# EAGLE board tashtari (EAGLE 6.5.0)
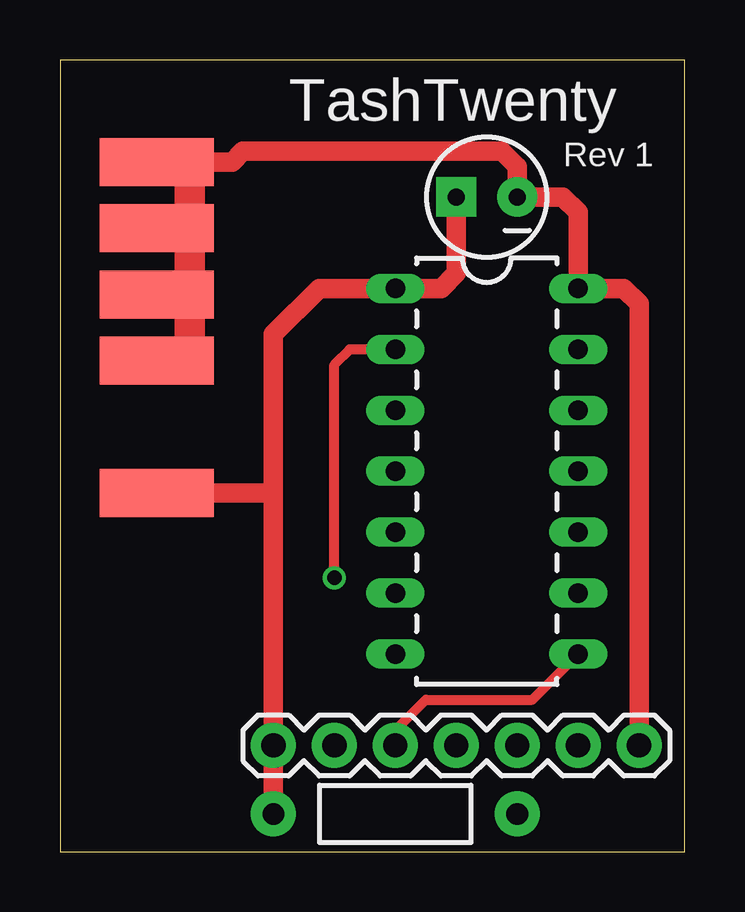
[diagram p0: board, top side]
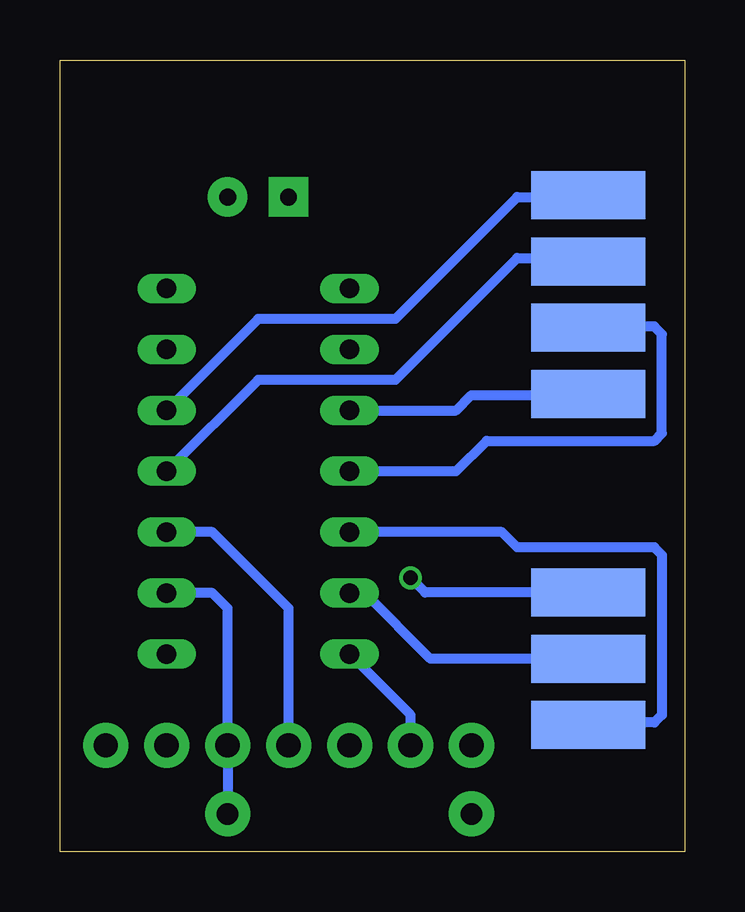
[diagram p1: board, bottom side, seen from below]

Size 26.04 x 33.02 mm. Coordinates in mm from the lower left corner, seen from the top.
Outline: 0,0 26.04,0 26.04,33.02 0,33.02 0,0
Copper layers (1*16): Top 0.0356mm / dielectric 1.5011mm / Bottom 0.0356mm
Design rules "LaenPCBOrder": minimum track width 6mil, minimum drill 13mil, track to track 6mil, track to pad 6mil, pad to pad 6mil, via to via 6mil, smd to smd 6mil, copper to edge 15mil, drill to drill 6mil, minimum pad ring 7mil, minimum via ring 7mil, stop-mask expansion 3mil, vias tented up to drill 0mil, thermal gap 10mil

## Footprints (pad centres in the part's own frame; a part is rotated, then mirrored left to right if it is on the bottom)
TP20SQ = smd 2 x 2: TP 0,0
DIL14 = drill 0.813 long: 1 -8.89,-3.81; 2 -6.35,-3.81; 3 -3.81,-3.81; 4 -1.27,-3.81; 5 1.27,-3.81; 6 3.81,-3.81; 7 6.35,-3.81; 8 6.35,3.81; 9 3.81,3.81; 10 1.27,3.81; 11 -1.27,3.81; 12 -3.81,3.81; 13 -6.35,3.81; 14 -8.89,3.81
1X07 = drill 1.016 pad 1.88: 1 0,0; 2 2.54,0; 3 5.08,0; 4 7.62,0; 5 10.16,0; 6 12.7,0; 7 15.24,0
CPOL-RADIAL-10UF-25V = drill 0.7 pad 1.651 square: 1 1.27,0 | drill 0.7 pad 1.651: 2 -1.27,0
AXIAL-0.4 = drill 0.9 pad 1.88: P$1 -5.08,0; P$2 5.08,0

## Placement (x,y rotation side)
E$1  [TP20SQ]  2.65,26 0 top
E$2  [TP20SQ]  2.65,28.76 0 top
E$3  [TP20SQ]  4.03,28.76 0 top
E$4  [TP20SQ]  5.41,28.76 0 top
E$5  [TP20SQ]  2.65,23.24 0 top
E$6  [TP20SQ]  2.65,20.48 0 top
E$7  [TP20SQ]  2.65,14.96 0 top
E$8  [TP20SQ]  4.03,20.48 0 top
E$9  [TP20SQ]  5.41,20.48 0 top
E$10  [TP20SQ]  4.03,26 0 top
E$11  [TP20SQ]  5.41,26 0 top
E$12  [TP20SQ]  4.03,23.24 0 top
E$13  [TP20SQ]  5.41,23.24 0 top
E$14  [TP20SQ]  5.41,14.96 0 top
E$15  [TP20SQ]  4.03,14.96 0 top
E$16  [TP20SQ]  2.65,10.82 0 bottom
E$17  [TP20SQ]  2.65,27.38 0 bottom
E$18  [TP20SQ]  4.03,27.38 0 bottom
E$19  [TP20SQ]  5.41,27.38 0 bottom
E$20  [TP20SQ]  2.65,24.62 0 bottom
E$21  [TP20SQ]  4.03,24.62 0 bottom
E$22  [TP20SQ]  5.41,24.62 0 bottom
E$23  [TP20SQ]  2.65,21.86 0 bottom
E$24  [TP20SQ]  4.03,21.86 0 bottom
E$25  [TP20SQ]  5.41,21.86 0 bottom
E$26  [TP20SQ]  2.65,19.1 0 bottom
E$27  [TP20SQ]  4.03,19.1 0 bottom
E$28  [TP20SQ]  5.41,19.1 0 bottom
E$29  [TP20SQ]  2.65,8.06 0 bottom
E$30  [TP20SQ]  2.65,5.3 0 bottom
E$31  [TP20SQ]  4.03,5.3 0 bottom
E$32  [TP20SQ]  5.41,5.3 0 bottom
E$33  [TP20SQ]  4.03,8.06 0 bottom
E$34  [TP20SQ]  5.41,8.06 0 bottom
E$35  [TP20SQ]  5.41,10.82 0 bottom
E$36  [TP20SQ]  4.03,10.82 0 bottom
E$37  [DIL14]  17.78,14.61 270 top
E$38  [1X07]  8.89,4.45 0 top
E$39  [CPOL-RADIAL-10UF-25V]  17.78,27.3 180 top
E$40  [AXIAL-0.4]  13.97,1.59 0 top

## Library data of the parts
E$1-E$36 = testpad
E$37 = SparkFun-DigitalIC
E$38 = SparkFun-Connectors
E$39 = SparkFun-Capacitors
E$40 = SparkFun-Passives

## Nets
S$1: E$14.TP E$37.1 E$38.1 E$39.1 E$40.P$1
S$2: E$4.TP E$9.TP E$11.TP E$13.TP E$37.14 E$38.7 E$39.2
S$3: E$37.7 E$38.2
S$4: E$37.8 E$38.3
S$5: E$37.10 E$38.4
S$6: E$37.9 E$38.5 E$40.P$2
S$7: E$32.TP E$37.5
S$8: E$34.TP E$37.6
S$9: E$35.TP E$37.2
S$10: E$28.TP E$37.3
S$11: E$25.TP E$37.4
S$12: E$22.TP E$37.11
S$13: E$19.TP E$37.12

## Tracks (layer width: path | path; a pad name or v marks a point on that pad's centre or on a via)
S$1
  Top 0.813: E$39.1 16.51,24.13 15.88,23.5 E$37.1 10.79,23.5 8.89,21.59 8.89,15.24 | 8.89,15.24 E$38.1 E$40.P$1 | E$14.TP 8.61,14.96 8.89,15.24
S$2
  Top 0.813: E$4.TP 7.17,28.76 7.62,29.21 18.41,29.21 19.05,28.57 E$39.2 20.95,27.3 21.59,26.67 E$37.14 23.5,23.5 24.13,22.86 E$38.7
  Top 1.27: E$9.TP E$13.TP E$11.TP E$4.TP
S$3
  Bottom 0.406: E$38.2 11.43,5.71 E$37.7
S$4
  Top 0.406: E$38.3 13.97,5.08 15.24,6.35 19.68,6.35 E$37.8
S$5
  Bottom 0.406: E$38.4 16.51,10.16 19.68,13.34 E$37.10
S$6
  Bottom 0.406: E$37.9 19.68,10.79 19.05,10.16 E$38.5 E$40.P$2
S$7
  Bottom 0.406: E$37.5 7.62,13.34 6.99,12.7 1.27,12.7 0.95,12.38 0.95,5.71 1.27,5.4 5.31,5.4 E$32.TP
S$8
  Bottom 0.406: E$34.TP 10.6,8.06 13.34,10.79 E$37.6
S$9  (via drill 0.6)
  Top 0.406: E$37.2 12.06,20.95 11.43,20.32 v11.43,11.43
  Bottom 0.406: E$35.TP 10.82,10.82 v11.43,11.43
S$10
  Bottom 0.406: E$37.3 9.53,18.41 8.89,19.05 5.46,19.05 E$28.TP
S$11
  Bottom 0.406: E$37.4 9.53,15.88 8.26,17.14 1.27,17.14 0.95,17.46 0.95,21.59 1.27,21.91 5.36,21.91 E$25.TP 5.14,21.59
S$12
  Bottom 0.406: E$37.11 17.78,19.68 12.06,19.68 6.99,24.77 5.55,24.77 E$22.TP
S$13
  Bottom 0.406: E$37.12 17.78,22.23 12.06,22.23 6.99,27.3 5.49,27.3 E$19.TP

## Text on the board
tNames: TashTwenty | Rev 1